# EAGLE board TD8Edaughter716 (EAGLE 6.6.0)
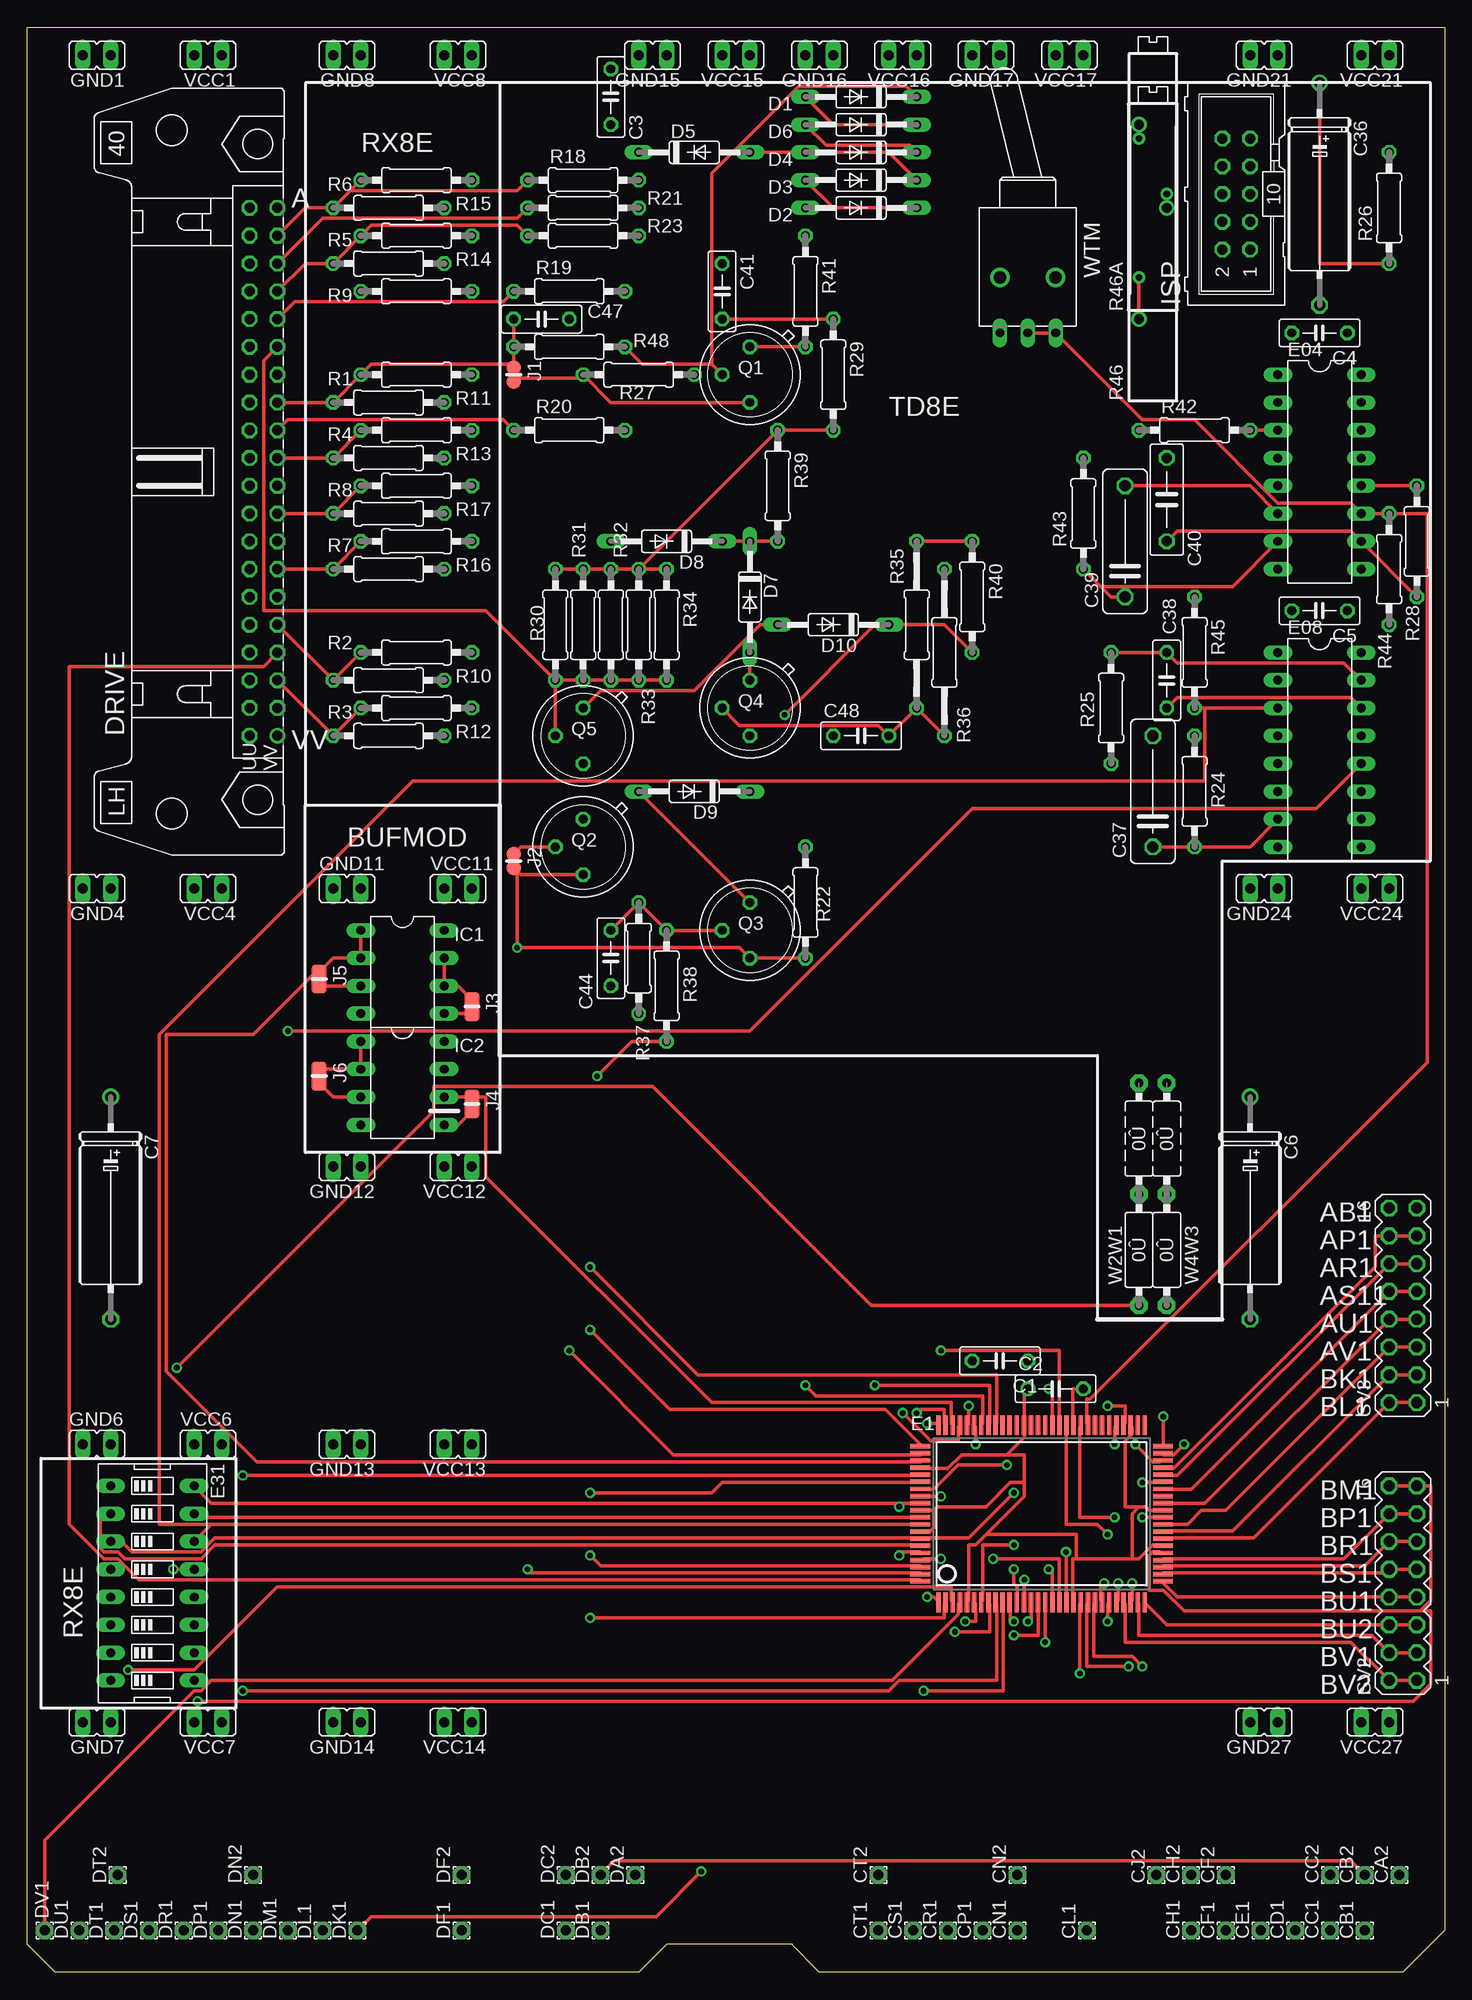
[diagram p0: board, top side]
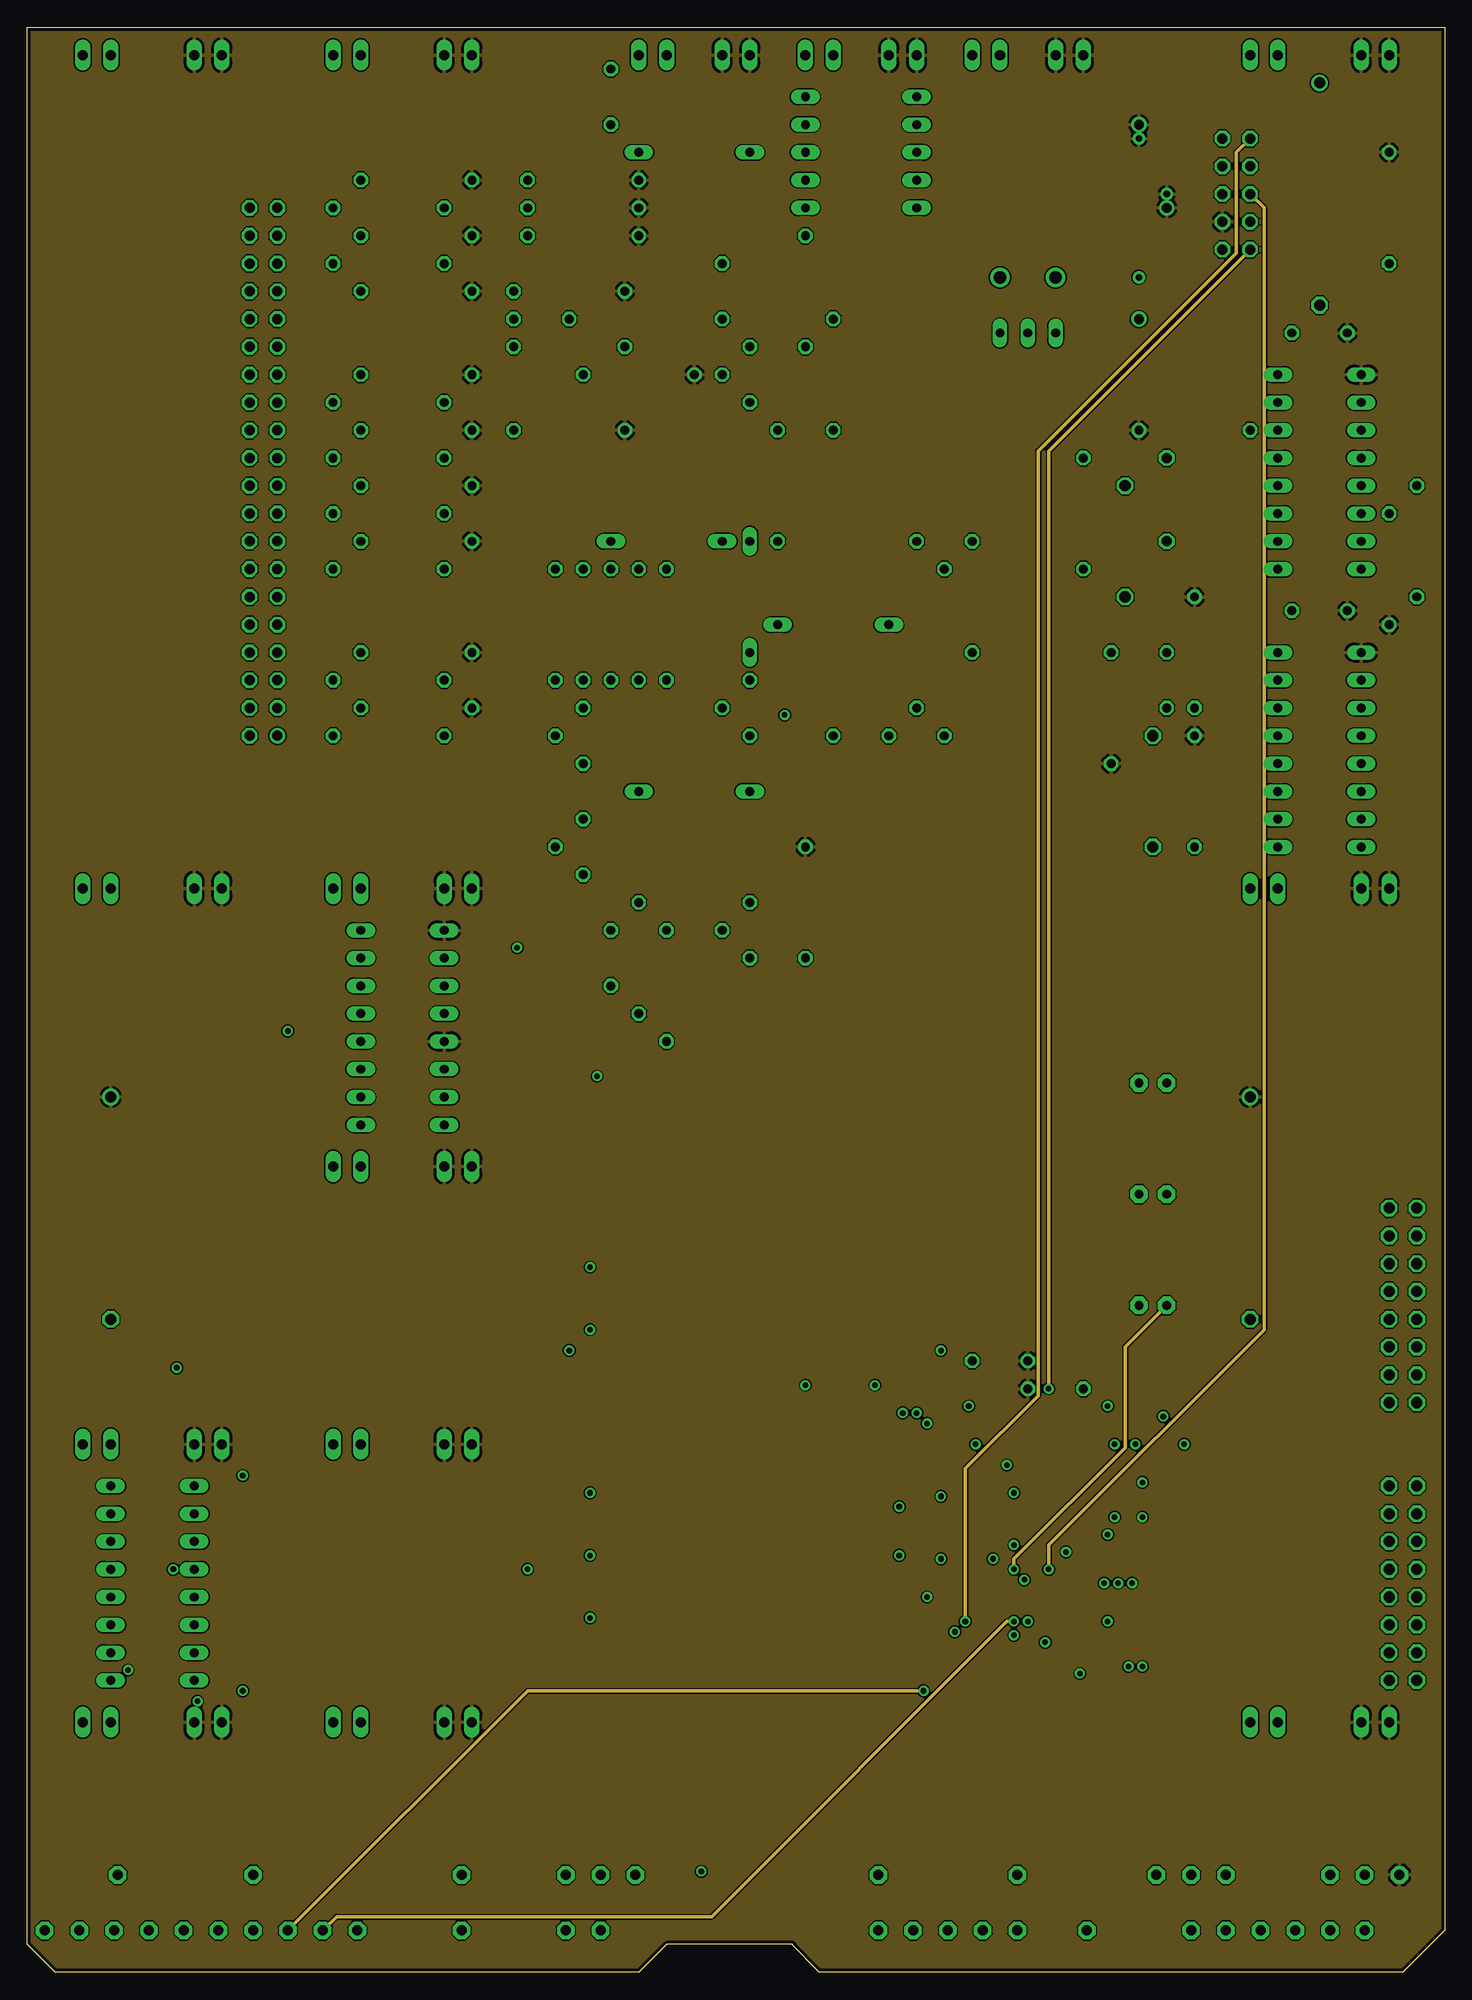
[diagram p1: board, inner layer VCC$]
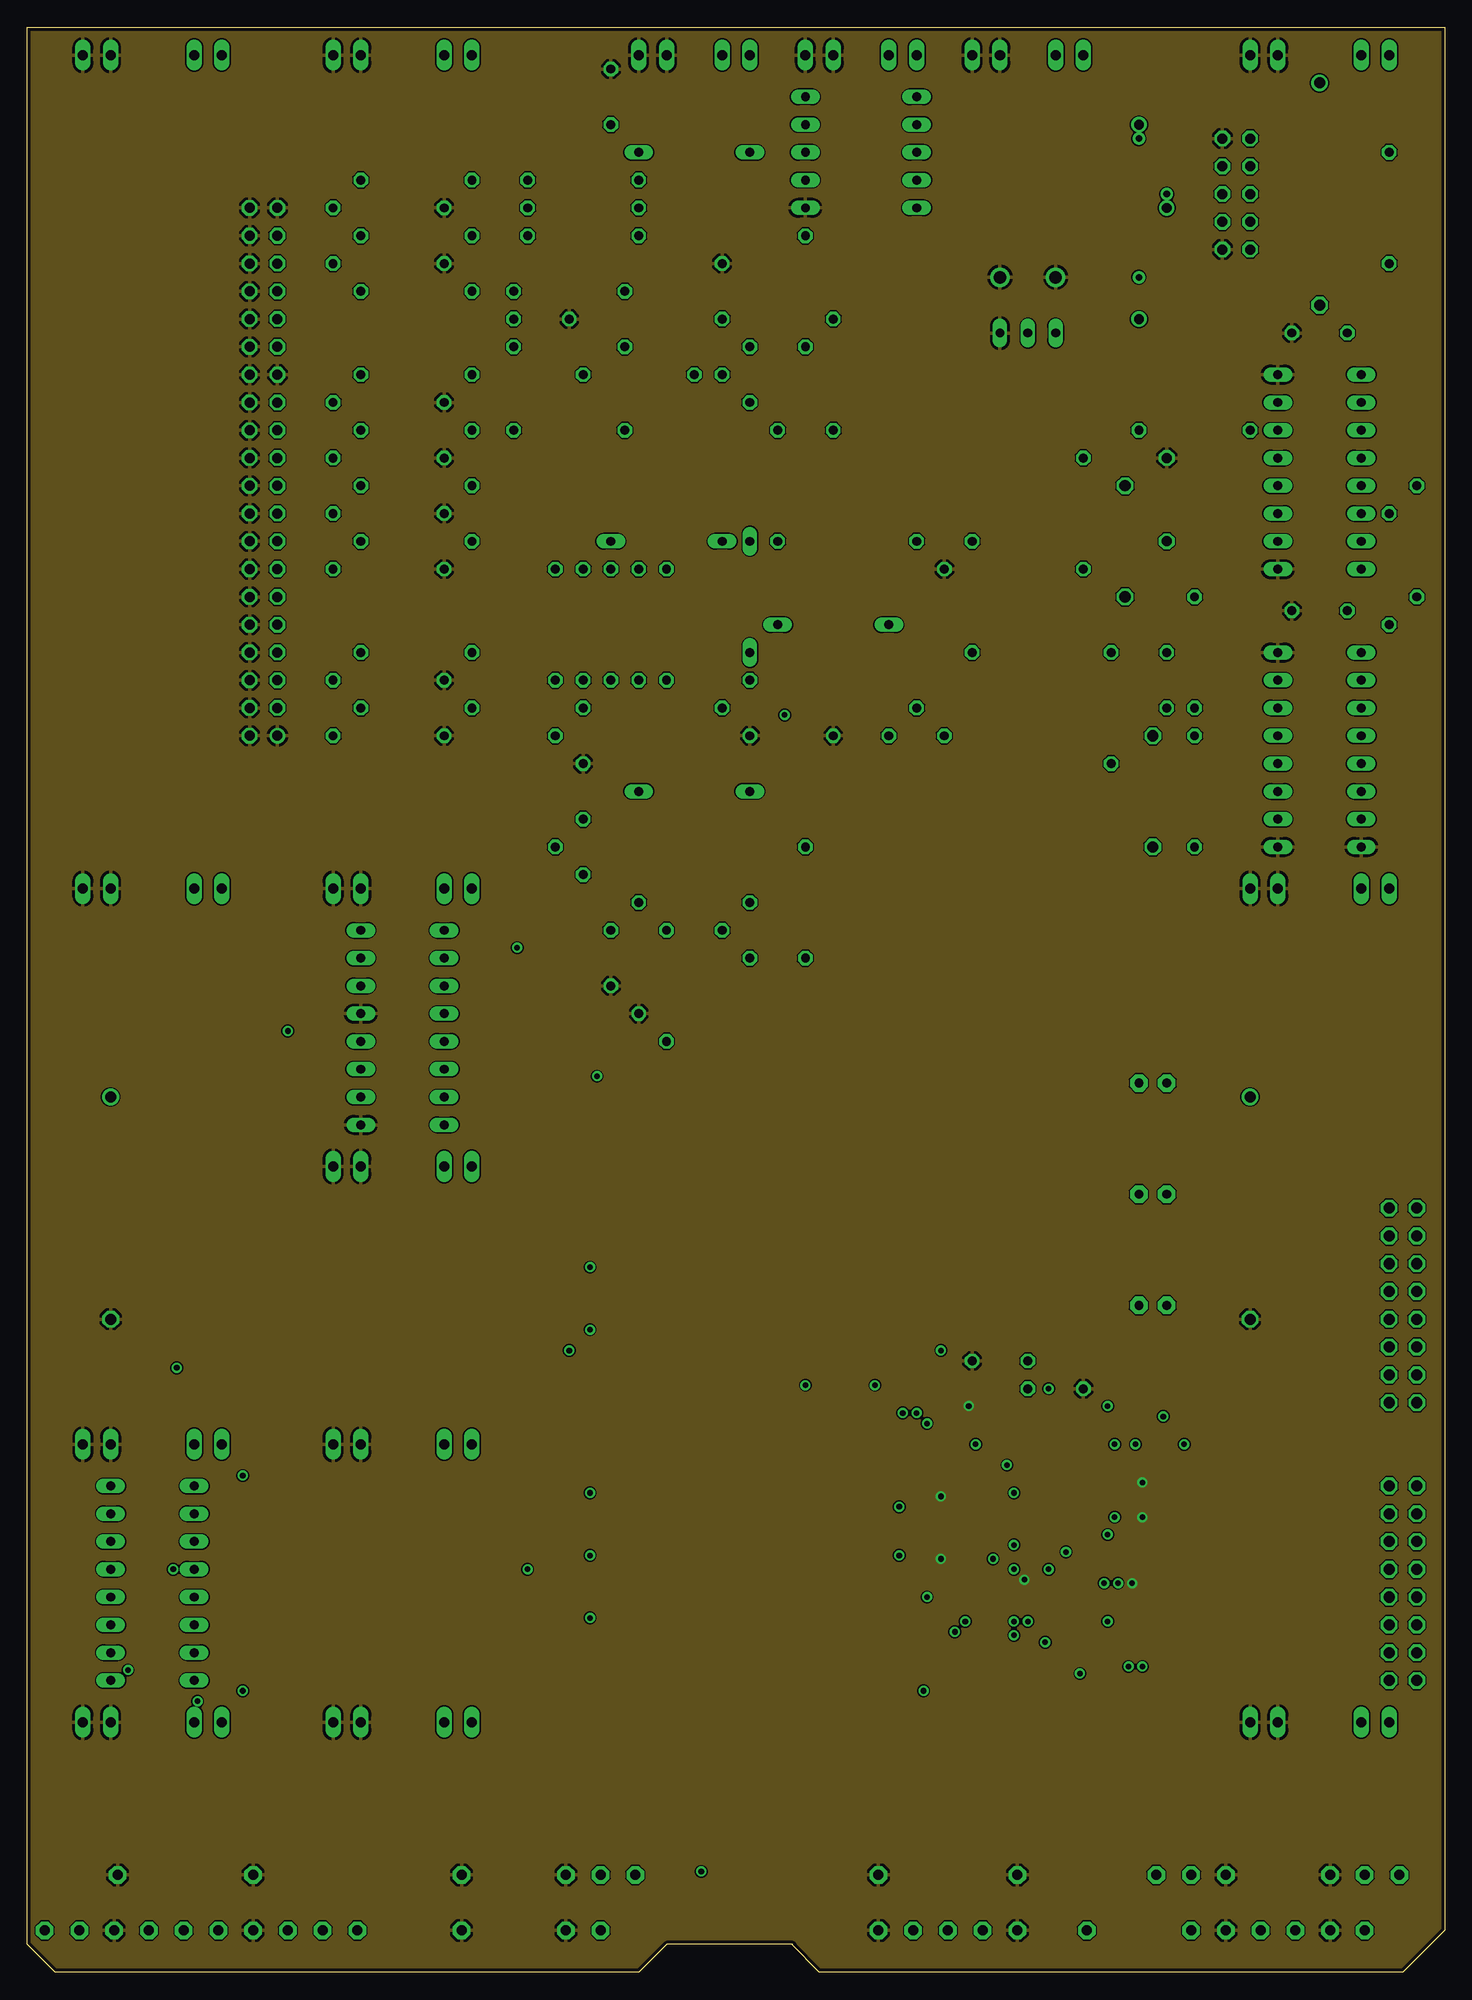
[diagram p2: board, inner layer GND$]
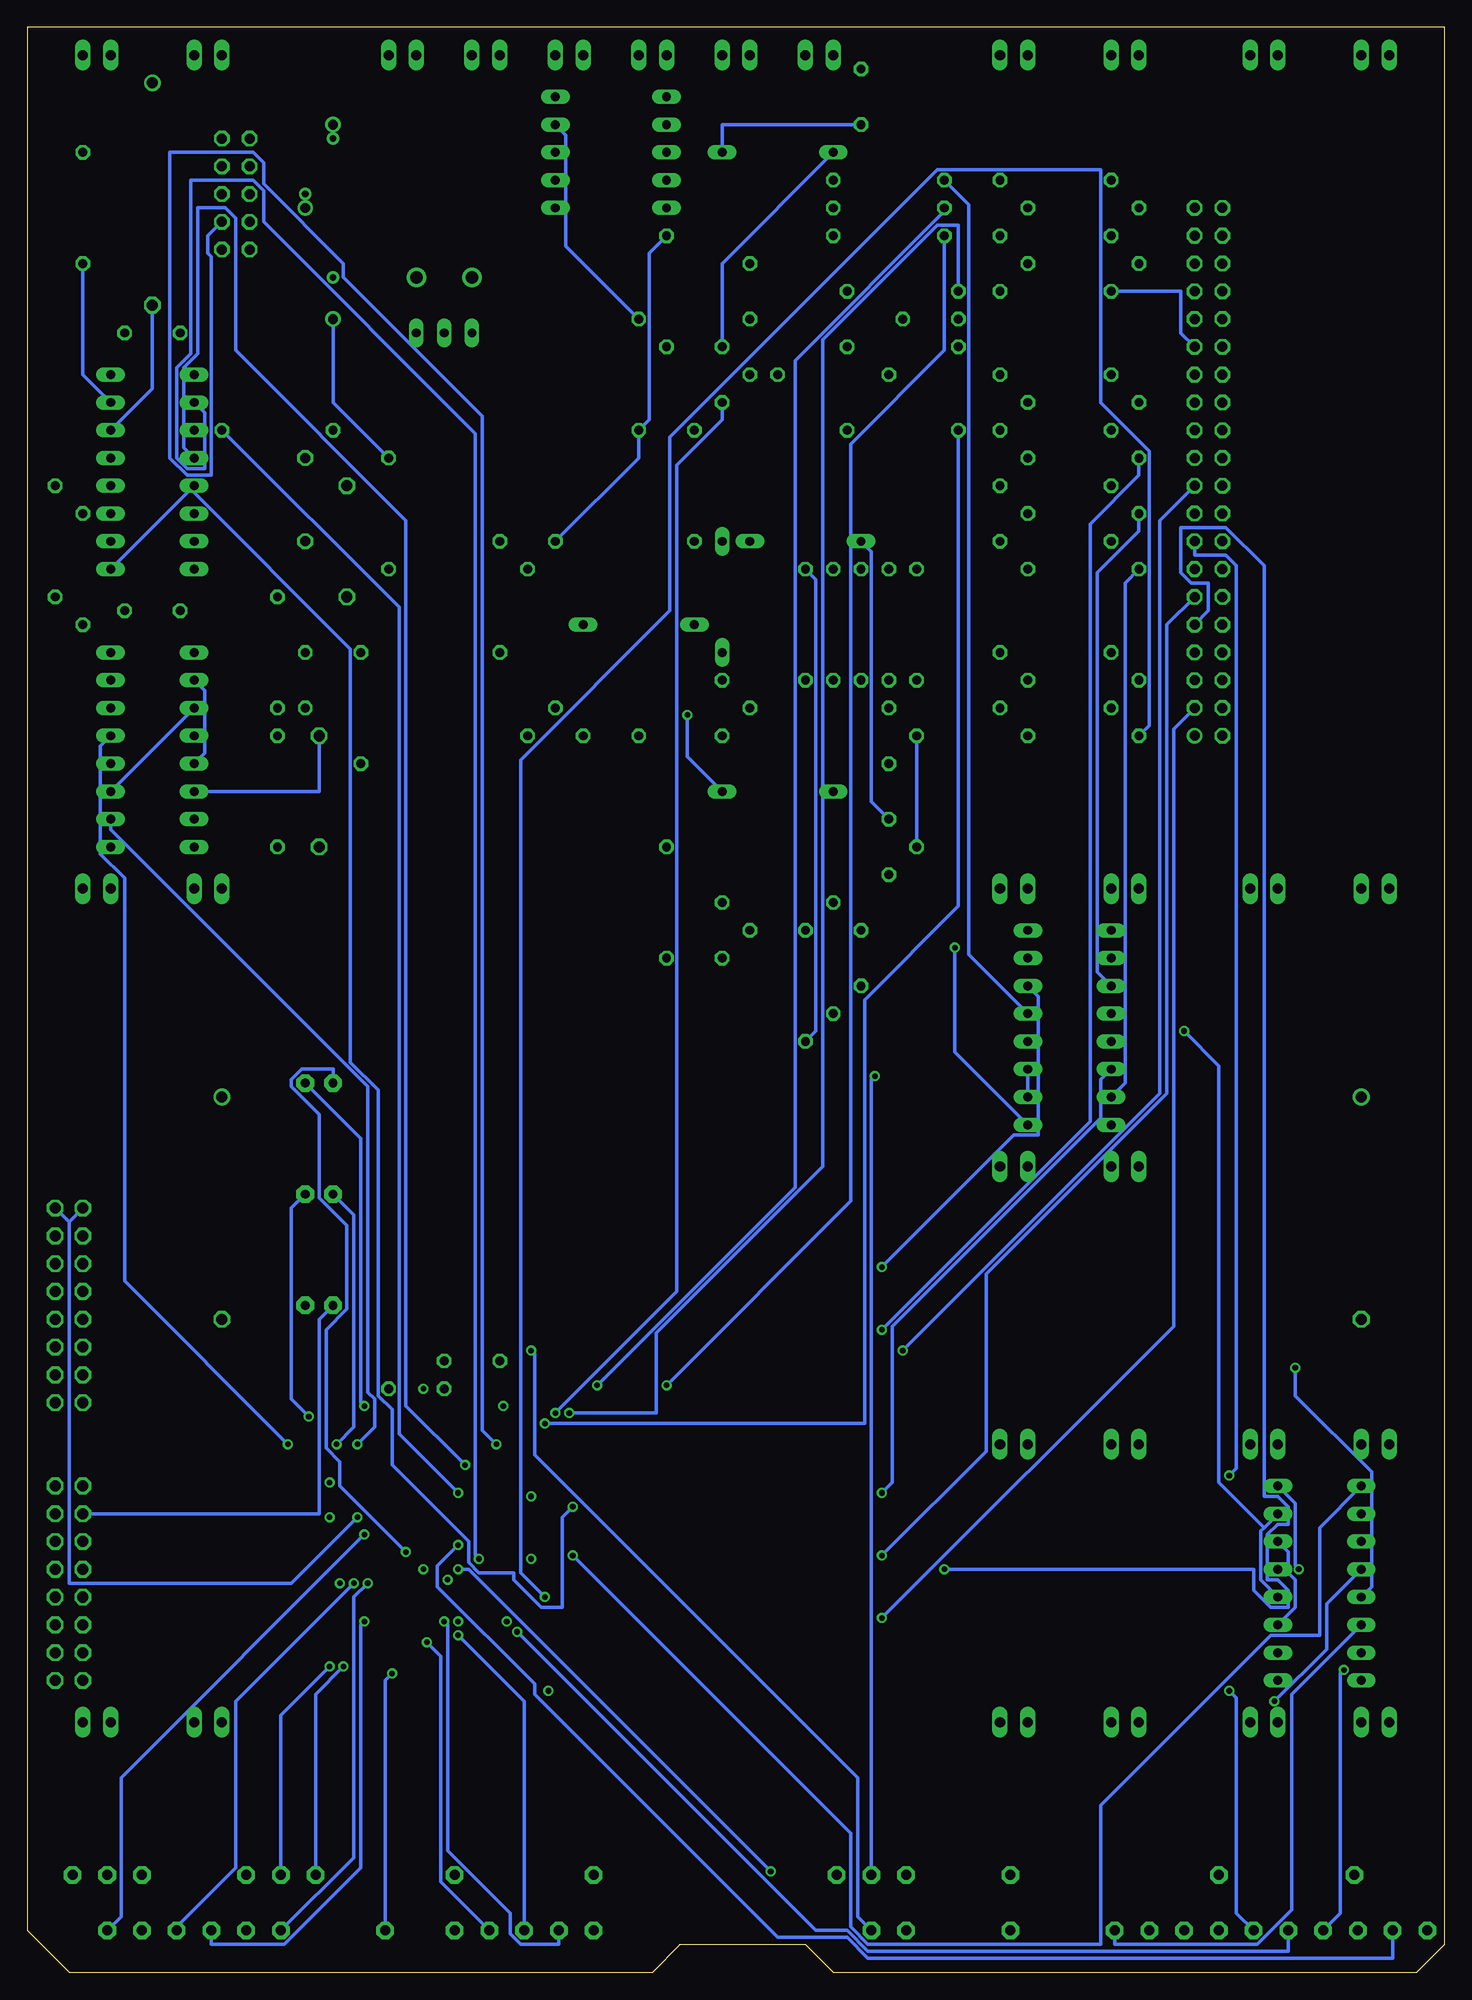
[diagram p3: board, bottom side, seen from below]

Size 129.54 x 177.8 mm. Coordinates in mm from the lower left corner, seen from the top.
Outline: 69.98,2.54 69.85,2.54
Outline: 69.85,2.54 72.39,0 125.73,0 129.54,3.81 129.54,177.8 0,177.8 0,2.54 2.54,0 55.88,0 58.42,2.54 69.85,2.54
Copper layers (1+2+3+16): Top 0.035mm / dielectric 1.5mm / VCC$ 0.035mm / dielectric 0.15mm / GND$ 0.035mm / dielectric 0.2mm / Bottom 0.035mm
Design rules "pld *": minimum track width 12mil, minimum drill 20mil, track to track 5mil, track to pad 5mil, pad to pad 5mil, via to via 10mil, smd to smd 5mil, copper to edge 13mil, drill to drill 10mil, minimum pad ring 10mil, minimum via ring 8mil, stop-mask expansion 0mil, vias tented up to drill 0mil, thermal gap 10mil

## Footprints (pad centres in the part's own frame; a part is rotated, then mirrored left to right if it is on the bottom)
C050-025X075 = drill 0.813 octagon: 1 -2.54,0; 2 2.54,0
E12-8 = drill 1.016: + -10.16,0 | drill 1.016 octagon: - 10.16,0
C102-043X133 = drill 1.016 octagon: 1 -5.08,0; 2 5.08,0
C075-032X103 = drill 0.914 octagon: 1 -3.81,0; 2 3.81,0
1,6/0,9 = drill 0.914 pad 1.6 octagon: 1 0,0
DO35-10 = drill 0.813 long: A 5.08,0; C -5.08,0
DEC40PINH = drill 0.914 octagon: A 24.13,1.27; AA -3.81,1.27; B 24.13,-1.27; BB -3.81,-1.27; C 21.59,1.27; CC -6.35,1.27; D 21.59,-1.27; DD -6.35,-1.27; E 19.05,1.27; EE -8.89,1.27; F 19.05,-1.27; FF -8.89,-1.27; H 16.51,1.27; HH -11.43,1.27; J 16.51,-1.27; JJ -11.43,-1.27; K 13.97,1.27; KK -13.97,1.27; L 13.97,-1.27; LL -13.97,-1.27; M 11.43,1.27; MM -16.51,1.27; N 11.43,-1.27; NN -16.51,-1.27; P 8.89,1.27; PP -19.05,1.27; R 8.89,-1.27; RR -19.05,-1.27; S 6.35,1.27; SS -21.59,1.27; T 6.35,-1.27; TT -21.59,-1.27; U 3.81,1.27; UU -24.13,1.27; V 3.81,-1.27; W 1.27,1.27; X 1.27,-1.27; Y -1.27,1.27; Z -1.27,-1.27 | drill 0.914: VV -24.13,-1.27
PQFP-100 = smd 0.4 x 1.8: 1 -9.425,-8.1; 2 -8.775,-8.1; 3 -8.125,-8.1; 4 -7.475,-8.1; 5 -6.825,-8.1; 6 -6.175,-8.1; 7 -5.525,-8.1; 8 -4.875,-8.1; 9 -4.225,-8.1; 10 -3.575,-8.1; 11 -2.925,-8.1; 12 -2.275,-8.1; 13 -1.625,-8.1; 14 -0.975,-8.1; 15 -0.325,-8.1; 16 0.325,-8.1; 17 0.975,-8.1; 18 1.625,-8.1; 19 2.275,-8.1; 20 2.925,-8.1; 21 3.575,-8.1; 22 4.225,-8.1; 23 4.875,-8.1; 24 5.525,-8.1; 25 6.175,-8.1; 26 6.825,-8.1; 27 7.475,-8.1; 28 8.125,-8.1; 29 8.775,-8.1; 30 9.425,-8.1; 51 9.425,8.1; 52 8.775,8.1; 53 8.125,8.1; 54 7.475,8.1; 55 6.825,8.1; 56 6.175,8.1; 57 5.525,8.1; 58 4.875,8.1; 59 4.225,8.1; 60 3.575,8.1; 61 2.925,8.1; 62 2.275,8.1; 63 1.625,8.1; 64 0.975,8.1; 65 0.325,8.1; 66 -0.325,8.1; 67 -0.975,8.1; 68 -1.625,8.1; 69 -2.275,8.1; 70 -2.925,8.1; 71 -3.575,8.1; 72 -4.225,8.1; 73 -4.875,8.1; 74 -5.525,8.1; 75 -6.175,8.1; 76 -6.825,8.1; 77 -7.475,8.1; 78 -8.125,8.1; 79 -8.775,8.1; 80 -9.425,8.1 | smd 1.8 x 0.4: 31 11.1,-6.175; 32 11.1,-5.525; 33 11.1,-4.875; 34 11.1,-4.225; 35 11.1,-3.575; 36 11.1,-2.925; 37 11.1,-2.275; 38 11.1,-1.625; 39 11.1,-0.975; 40 11.1,-0.325; 41 11.1,0.325; 42 11.1,0.975; 43 11.1,1.625; 44 11.1,2.275; 45 11.1,2.925; 46 11.1,3.575; 47 11.1,4.225; 48 11.1,4.875; 49 11.1,5.525; 50 11.1,6.175; 81 -11.1,6.175; 82 -11.1,5.525; 83 -11.1,4.875; 84 -11.1,4.225; 85 -11.1,3.575; 86 -11.1,2.925; 87 -11.1,2.275; 88 -11.1,1.625; 89 -11.1,0.975; 90 -11.1,0.325; 91 -11.1,-0.325; 92 -11.1,-0.975; 93 -11.1,-1.625; 94 -11.1,-2.275; 95 -11.1,-2.925; 96 -11.1,-3.575; 97 -11.1,-4.225; 98 -11.1,-4.875; 99 -11.1,-5.525; 100 -11.1,-6.175
DIL16 = drill 0.813 long: 1 -8.89,-3.81; 2 -6.35,-3.81; 3 -3.81,-3.81; 4 -1.27,-3.81; 5 1.27,-3.81; 6 3.81,-3.81; 7 6.35,-3.81; 8 8.89,-3.81; 9 8.89,3.81; 10 6.35,3.81; 11 3.81,3.81; 12 1.27,3.81; 13 -1.27,3.81; 14 -3.81,3.81; 15 -6.35,3.81; 16 -8.89,3.81
EDG-08 = drill 0.813 long: 1 -8.89,-3.81; 2 -6.35,-3.81; 3 -3.81,-3.81; 4 -1.27,-3.81; 5 1.27,-3.81; 6 3.81,-3.81; 7 6.35,-3.81; 8 8.89,-3.81; 9 8.89,3.81; 10 6.35,3.81; 11 3.81,3.81; 12 1.27,3.81; 13 -1.27,3.81; 14 -3.81,3.81; 15 -6.35,3.81; 16 -8.89,3.81
JP1 = drill 0.914 long: 1 0,-1.27; 2 0,1.27
DIL08 = drill 0.813 long: 1 -3.81,-3.81; 2 -1.27,-3.81; 3 1.27,-3.81; 4 3.81,-3.81; 5 3.81,3.81; 6 1.27,3.81; 7 -1.27,3.81; 8 -3.81,3.81
ML10 = drill 0.914 octagon: 1 -5.08,-1.27; 2 -5.08,1.27; 3 -2.54,-1.27; 4 -2.54,1.27; 5 0,-1.27; 6 0,1.27; 7 2.54,-1.27; 8 2.54,1.27; 9 5.08,-1.27; 10 5.08,1.27
NC1 = smd 1.346 x 1.346: 1 -0.635,0; 2 0.635,0
NC2 = smd 1.346 x 1.346: 1 -0.635,0; 2 0.635,0
TO5 = drill 0.813 octagon: 1 0,-2.54; 2 2.54,0; 3 0,2.54
0207/10 = drill 0.813 octagon: 1 -5.08,0; 2 5.08,0
0207/15 = drill 0.813 octagon: 1 -7.62,0; 2 7.62,0
3006Y = drill 0.9: 1 -8.89,1.27; 2 1.27,-1.27; 3 8.89,1.27
RTRIM3006P = drill 0.61: 1 -7.62,1.27; 2 0,-1.27; 3 5.08,1.27
MA08-2 = drill 1.016 octagon: 1 -8.89,-1.27; 2 -8.89,1.27; 3 -6.35,-1.27; 4 -6.35,1.27; 5 -3.81,-1.27; 6 -3.81,1.27; 7 -1.27,-1.27; 8 -1.27,1.27; 9 1.27,-1.27; 10 1.27,1.27; 11 3.81,-1.27; 12 3.81,1.27; 13 6.35,-1.27; 14 6.35,1.27; 15 8.89,-1.27; 16 8.89,1.27
0R2/10 = drill 0.813 pad 1.6 octagon: 1 -5.08,0; 2 5.08,0; 3 15.24,0
9070-1W = drill 0.813 long: 1 5.08,-2.54; 2 5.08,0; 3 5.08,2.54 | drill 1.118 pad 1.778: B 0,-2.54; B1 0,2.54

## Placement (x,y rotation side)
C1  .22uF  [C050-025X075]  88.9,55.88 180 top
C2  .22uF  [C050-025X075]  93.98,53.34 0 top
C3  .01uF  [C050-025X075]  53.34,171.45 270 top
C4  .01uF  [C050-025X075]  118.11,149.86 180 top
C5  .01uF  [C050-025X075]  118.11,124.46 180 top
C6  6.8uF  [E12-8]  111.76,69.85 270 top
C7  6.8uF  [E12-8]  7.62,69.85 270 top
C36  6.8uF  [E12-8]  118.11,162.56 270 top
C37  2700pF  [C102-043X133]  102.87,107.95 90 top
C38  27pF  [C050-025X075]  104.14,118.11 270 top
C39  2700pF  [C102-043X133]  100.33,130.81 90 top
C40  560pF  [C075-032X103]  104.14,134.62 90 top
C41  .01uF  [C050-025X075]  63.5,153.67 270 top
C44  .01uF  [C050-025X075]  53.34,92.71 90 top
C47  .01uF  [C050-025X075]  46.99,151.13 0 top
C48  .01uF  [C050-025X075]  76.2,113.03 0 top
CA2  [1,6/0,9]  125.41,8.89 90 top
CB1  [1,6/0,9]  122.24,3.81 90 top
CB2  [1,6/0,9]  122.24,8.89 90 top
CC1  [1,6/0,9]  119.06,3.81 90 top
CC2  [1,6/0,9]  119.06,8.89 90 top
CD1  [1,6/0,9]  115.89,3.81 90 top
CE1  [1,6/0,9]  112.71,3.81 90 top
CF1  [1,6/0,9]  109.54,3.81 90 top
CF2  [1,6/0,9]  109.54,8.89 90 top
CH1  [1,6/0,9]  106.36,3.81 90 top
CH2  [1,6/0,9]  106.36,8.89 90 top
CJ2  [1,6/0,9]  103.19,8.89 90 top
CL1  [1,6/0,9]  96.84,3.81 90 top
CN1  [1,6/0,9]  90.49,3.81 90 top
CN2  [1,6/0,9]  90.49,8.89 90 top
CP1  [1,6/0,9]  87.31,3.81 90 top
CR1  [1,6/0,9]  84.14,3.81 90 top
CS1  [1,6/0,9]  80.96,3.81 90 top
CT1  [1,6/0,9]  77.79,3.81 90 top
CT2  [1,6/0,9]  77.79,8.89 90 top
D1  1N4154  [DO35-10]  76.2,171.45 180 top
D2  1N4148  [DO35-10]  76.2,161.29 180 top
D3  1N4148  [DO35-10]  76.2,163.83 180 top
D4  1N4148  [DO35-10]  76.2,166.37 180 top
D5  1N4154  [DO35-10]  60.96,166.37 0 top
D6  1N4148  [DO35-10]  76.2,168.91 180 top
D7  1N4154  [DO35-10]  66.04,125.73 270 top
D8  1N4154  [DO35-10]  58.42,130.81 180 top
D9  1N4154  [DO35-10]  60.96,107.95 180 top
D10  1N4154  [DO35-10]  73.66,123.19 180 top
DA2  [1,6/0,9]  55.56,8.89 90 top
DB1  [1,6/0,9]  52.39,3.81 90 top
DB2  [1,6/0,9]  52.39,8.89 90 top
DC1  [1,6/0,9]  49.21,3.81 90 top
DC2  [1,6/0,9]  49.21,8.89 90 top
DF1  [1,6/0,9]  39.69,3.81 90 top
DF2  [1,6/0,9]  39.69,8.89 90 top
DK1  [1,6/0,9]  30.16,3.81 90 top
DL1  [1,6/0,9]  26.99,3.81 90 top
DM1  [1,6/0,9]  23.81,3.81 90 top
DN1  [1,6/0,9]  20.64,3.81 90 top
DN2  [1,6/0,9]  20.64,8.89 90 top
DP1  [1,6/0,9]  17.46,3.81 90 top
DR1  [1,6/0,9]  14.29,3.81 90 top
DRIVE  [DEC40PINH]  21.59,137.16 90 top
DS1  [1,6/0,9]  11.11,3.81 90 top
DT1  [1,6/0,9]  7.94,3.81 90 top
DT2  [1,6/0,9]  8.26,8.89 90 top
DU1  [1,6/0,9]  4.76,3.81 90 top
DV1  [1,6/0,9]  1.59,3.81 90 top
E1  ATF150X100PQFP  [PQFP-100]  92.71,41.91 0 top
E04  74123N  [DIL16]  118.11,137.16 270 top
E08  74123N  [DIL16]  118.11,111.76 270 top
E31  [EDG-08]  11.43,35.56 270 top
GND1  [JP1]  6.35,175.26 90 top
GND4  [JP1]  6.35,99.06 90 top
GND6  [JP1]  6.35,48.26 270 top
GND7  [JP1]  6.35,22.86 90 top
GND8  [JP1]  29.21,175.26 90 top
GND11  [JP1]  29.21,99.06 270 top
GND12  [JP1]  29.21,73.66 90 top
GND13  [JP1]  29.21,48.26 90 top
GND14  [JP1]  29.21,22.86 90 top
GND15  [JP1]  57.15,175.26 90 top
GND16  [JP1]  72.39,175.26 90 top
GND17  [JP1]  87.63,175.26 90 top
GND21  [JP1]  113.03,175.26 90 top
GND24  [JP1]  113.03,99.06 90 top
GND27  [JP1]  113.03,22.86 90 top
IC1  DS75453N  [DIL08]  34.29,91.44 270 top
IC2  DS75453N  [DIL08]  34.29,81.28 270 top
ISP  [ML10]  110.49,162.56 90 top
J1  JUMPER-NC  [NC1]  44.45,146.05 270 top
J2  JUMPER-NC  [NC1]  44.45,101.6 270 top
J3  JUMPER-NC2  [NC2]  40.64,88.27 270 top
J4  JUMPER-NC2  [NC2]  40.64,79.38 270 top
J5  JUMPER-NC2  [NC2]  26.67,90.81 270 top
J6  JUMPER-NC2  [NC2]  26.67,81.92 270 top
Q1  MPS6534  [TO5]  66.04,146.05 180 top
Q2  MPS6534  [TO5]  50.8,102.87 180 top
Q3  MPS6534  [TO5]  66.04,95.25 180 top
Q4  MPS6534  [TO5]  66.04,115.57 180 top
Q5  MPS6534  [TO5]  50.8,113.03 180 top
R1  180  [0207/10]  35.56,146.05 0 top
R2  180  [0207/10]  35.56,120.65 0 top
R3  180  [0207/10]  35.56,115.57 0 top
R4  180  [0207/10]  35.56,140.97 0 top
R5  180  [0207/10]  35.56,158.75 0 top
R6  180  [0207/10]  35.56,163.83 0 top
R7  180  [0207/10]  35.56,130.81 0 top
R8  180  [0207/10]  35.56,135.89 0 top
R9  120  [0207/10]  35.56,153.67 0 top
R10  390  [0207/10]  33.02,118.11 180 top
R11  390  [0207/10]  33.02,143.51 180 top
R12  390  [0207/10]  33.02,113.03 180 top
R13  390  [0207/10]  33.02,138.43 180 top
R14  390  [0207/10]  33.02,156.21 180 top
R15  390  [0207/10]  33.02,161.29 180 top
R16  390  [0207/10]  33.02,128.27 180 top
R17  390  [0207/10]  33.02,133.35 180 top
R18  270  [0207/10]  50.8,163.83 0 top
R19  270  [0207/10]  49.53,153.67 0 top
R20  270  [0207/10]  49.53,140.97 0 top
R21  270  [0207/10]  50.8,161.29 0 top
R22  6.8K  [0207/10]  71.12,97.79 90 top
R23  270  [0207/10]  50.8,158.75 0 top
R24  10K  [0207/10]  106.68,107.95 90 top
R25  4.7K  [0207/10]  99.06,115.57 270 top
R26  51K  [0207/10]  124.46,161.29 90 top
R27  1.5K  [0207/10]  55.88,146.05 0 top
R28  220  [0207/10]  127,130.81 90 top
R29  1.5K  [0207/10]  73.66,146.05 270 top
R30  1K  [0207/10]  48.26,123.19 270 top
R31  1K  [0207/10]  50.8,123.19 270 top
R32  1K  [0207/10]  53.34,123.19 270 top
R33  1K  [0207/10]  55.88,123.19 270 top
R34  1K  [0207/10]  58.42,123.19 270 top
R35  1.21K 1%  [0207/15]  81.28,123.19 270 top
R36  562 1%  [0207/15]  83.82,120.65 90 top
R37  1.5K  [0207/10]  55.88,92.71 270 top
R38  1K  [0207/10]  58.42,90.17 90 top
R39  1.5K  [0207/10]  68.58,135.89 270 top
R40  1K  [0207/10]  86.36,125.73 270 top
R41  3K  [0207/10]  71.12,153.67 270 top
R42  1K  [0207/10]  106.68,140.97 0 top
R43  4.7K  [0207/10]  96.52,133.35 90 top
R44  1.5K  [0207/10]  124.46,128.27 270 top
R45  1K  [0207/10]  106.68,120.65 270 top
R46  20K  [3006Y]  102.87,160.02 90 top
R46A  20K  [RTRIM3006P]  102.87,162.56 90 top
R48  470  [0207/10]  49.53,148.59 0 top
SV2  [MA08-2]  125.73,35.56 90 top
SV3  [MA08-2]  125.73,60.96 90 top
VCC1  [JP1]  16.51,175.26 90 top
VCC4  [JP1]  16.51,99.06 90 top
VCC6  [JP1]  16.51,48.26 270 top
VCC7  [JP1]  16.51,22.86 90 top
VCC8  [JP1]  39.37,175.26 90 top
VCC11  [JP1]  39.37,99.06 270 top
VCC12  [JP1]  39.37,73.66 90 top
VCC13  [JP1]  39.37,48.26 90 top
VCC14  [JP1]  39.37,22.86 90 top
VCC15  [JP1]  64.77,175.26 90 top
VCC16  [JP1]  80.01,175.26 90 top
VCC17  [JP1]  95.25,175.26 90 top
VCC21  [JP1]  123.19,175.26 90 top
VCC24  [JP1]  123.19,99.06 90 top
VCC27  [JP1]  123.19,22.86 90 top
W2W1  [0R2/10]  101.6,66.04 90 top
W4W3  [0R2/10]  104.14,66.04 90 top
WTM  [9070-1W]  91.44,154.94 270 top

## Library data of the parts
C1-C5 C37-C41 C44 C47 C48 R1-R45 R46A R48 = rcl
C6 C7 C36 DRIVE IC1 IC2 J1-J6 R46 = dec-con
CA2 CB1 CB2 CC1 CC2 CD1 CE1 CF1 CF2 CH1 CH2 CJ2 CL1 CN1 CN2 CP1 CR1 CS1 CT1 CT2 DA2 DB1 DB2 DC1 DC2 DF1 DF2 DK1 DL1 DM1 DN1 DN2 DP1 DR1 DS1 DT1 DT2 DU1 DV1 = wirepad
D1-D10 = diode
E1 = atmel-cpld
E04 E08 = 74xx-us
E31 = special
GND1 GND4 GND6-GND8 GND11-GND17 GND21 GND24 GND27 VCC1 VCC4 VCC6-VCC8 VCC11-VCC17 VCC21 VCC24 VCC27 W2W1 W4W3 = jumper
ISP = con-harting-ml; OC_FARNELL: unknown; OC_NEWARK: unknown
Q1-Q5 = transistor-npn
SV2 SV3 = con-lstb; OC_FARNELL: unknown; OC_NEWARK: unknown
WTM = switch

## Nets
!C0: CE1.1 E1.25
!C1: CH1.1 E1.24
!CC_TPG_CLK: C40.1 E04.10 R28.1
!CLRDLY: E1.94 E04.3 E31.3 R42.2
!DATA0: E1.46 SV3.11 SV3.12
!DATA1: E1.44 SV3.9 SV3.10
!DATA2: E1.42 SV3.7 SV3.8
!DATA3: E1.39 SV3.5 SV3.6
!DATA4: E1.33 SV2.11 SV2.12
!DATA5: E1.32 SV2.9 SV2.10
!DATA6: E1.31 SV2.7 SV2.8
!DATA7: E1.29 SV2.3 SV2.4
!DATA8: DR1.1 E1.8
!DATA9: DS1.1 E1.3
!DATA10: DU1.1 E1.7
!DATA11: DV1.1 E1.4
!DF_SEL_ER: IC2.5 J2.2 J4.2 Q2.3 Q3.3 R22.1
!DONE_SKIP: CB1.1 E1.62
!INT_RQST: CP1.1 E1.16
!INTERNAL_IO: CL1.1 E1.21
!IO_PAUSE: CD1.1 E1.26
!MD03: E1.47 SV3.13 SV3.14
!MD04: E1.38 SV3.3 SV3.4
!MD05: E1.37 SV3.1 SV3.2
!MD06: E1.35 E31.4 SV2.15 SV2.16
!MD07: E1.34 E31.5 SV2.13 SV2.14 W2W1.1
!MD08: DK1.1 E1.12 E31.6 W4W3.1
!MD09: DL1.1 E1.11
!MD10: DM1.1 E1.10
!MD11: DP1.1 E1.9
!POWER_OK: E1.27 SV2.1 SV2.2
!SKIP: CS1.1 E1.14
!TR_SKIP: DB1.1 E1.63
+15V: DA2.1
-1.5V: C3.2 D3.C D4.A D5.A
-3V: C41.2 D1.A D6.C R29.1
-4.7V: C48.2 Q4.2 R35.2 R36.1
-9V: C44.2 Q3.2 R37.1 R38.2
-15V [supply]: CB2.1 DB2.1 R29.2 R30.1 R31.1 R32.1 R33.1 R34.1 R35.1 R38.1 R39.1 R40.1 R41.1
BB: DRIVE.BB IC1.3 J5.2 R8.1 R17.2
BB-CPLD: E1.83 IC1.1 IC1.2 J5.1
CC_DTP: E1.49 E08.13
CC_SETDLY: E1.18 E04.2
CC_T/M_EN: E1.59 E04.11 R44.1 WTM.2 WTM.3
CC_TPG_CLK: E1.89 E04.5 E04.9 E31.13 E31.16
CC_TT_EN: E1.55 E08.10
D: DRIVE.D IC1.5 J3.2 R6.1 R15.2 R18.1
D-CPLD: E1.72 IC1.6 IC1.7 J3.1
DD: DRIVE.DD E1.85
F: DRIVE.F E1.73 R21.1
FF: DRIVE.FF IC2.3 J6.2 R7.1 R16.2
FF-CPLD: E1.86 IC2.1 IC2.2 J6.1
GND [supply]: C1.2 C2.2 C3.1 C4.2 C5.2 C6.- C7.- C40.2 C41.1 C44.1 C47.2 C48.1 CC1.1 CC2.1 CF1.1 CF2.1 CN1.1 CN2.1 CT1.1 CT2.1 D2.A DC1.1 DC2.1 DF1.1 DF2.1 DN1.1 DN2.1 DRIVE.A DRIVE.AA DRIVE.B DRIVE.C DRIVE.CC DRIVE.E DRIVE.EE DRIVE.H DRIVE.HH DRIVE.K DRIVE.KK DRIVE.M DRIVE.MM DRIVE.P DRIVE.PP DRIVE.R DRIVE.S DRIVE.SS DRIVE.U DRIVE.UU DRIVE.VV DRIVE.W DRIVE.Y DT1.1 DT2.1 E1.13 E1.28 E1.40 E1.45 E1.61 E1.76 E1.88 E1.97 E04.1 E04.8 E08.1 E08.8 E08.9 GND1.1 GND1.2 GND4.1 GND4.2 GND6.1 GND6.2 GND7.1 GND7.2 GND8.1 GND8.2 GND11.1 GND11.2 GND12.1 GND12.2 GND13.1 GND13.2 GND14.1 GND14.2 GND15.1 GND15.2 GND16.1 GND16.2 GND17.1 GND17.2 GND21.1 GND21.2 GND24.1 GND24.2 GND27.1 GND27.2 IC1.4 IC2.4 ISP.2 ISP.10 Q4.3 Q5.3 R10.1 R11.1 R12.1 R13.1 R14.1 R15.1 R16.1 R17.1 R36.2 R37.2 WTM.1 WTM.B WTM.B1
IN1: E1.92 E08.3 E08.11 E31.11 E31.14 R45.2
IN2: E1.91 E08.12 E31.12 E31.15
IN3: E1.87 E04.4
INITIALIZE: CR1.1 E1.15
J: DRIVE.J E1.74 R5.1 R14.2 R23.1
JJ: DRIVE.JJ E1.98
L: DRIVE.L E1.77 R19.1
LL: DRIVE.LL E1.99 R2.1 R10.2
N$18: E1.95 E31.2
N$19: E1.96 E31.1
N$51: D1.C Q1.2 R48.2
N$52: D5.C Q1.1 R41.2
N$54: D2.C D3.A
N$55: D9.C D10.C R40.2
N$56: D4.C D6.A
N$57: D10.A Q5.1
N$58: D9.A Q3.1
N$59: D8.A Q2.1
N$60: D7.A Q4.1
N$63: D7.C D8.C R39.2
N$77: E08.2 E08.5
N$78: C37.1 E08.7 R24.1
N$79: C38.1 E08.15 R25.1
N$81: C38.2 E08.14
N$82: C37.2 E08.6
N$94: C36.+ E04.15 R26.1
N$95: C36.- E04.14
N$108: C39.1 E04.7 R43.1
N$110: C39.2 E04.6
N$111: R43.2 R46.1 R46A.1
N$112: E04.12 R28.2
N-CPLD: E1.78 IC2.6 IC2.7 J4.1
N-DRIVE: DRIVE.N J2.1 Q2.2 Q5.2 R9.1 R30.2 R31.2 R32.2 R33.2 R34.2
NN: DRIVE.NN E1.100
PARITY: E1.60 SV3.15 SV3.16
RR: DRIVE.RR E1.1 R3.1 R12.2
RUN: E1.30 SV2.5 SV2.6
T-CPLD: E1.79 J1.2 Q1.3 R27.1
T-DRIVE: C47.1 DRIVE.T J1.1 R1.1 R11.2 R48.1
TCK: E1.64 ISP.1
TDI: E1.6 ISP.9
TDO: E1.75 ISP.3
TMS: E1.17 ISP.5
TP3: CH2.1 E1.23
TP4: CJ2.1 E1.22
TT: DRIVE.TT E1.2
V: DRIVE.V E1.80 R20.1
VCC [supply]: C1.1 C2.1 C4.1 C5.1 C6.+ C7.+ CA2.1 E1.5 E1.20 E1.36 E1.41 E1.53 E1.68 E1.84 E1.90 E1.93 E04.16 E08.16 IC1.8 IC2.8 ISP.4 R1.2 R2.2 R3.2 R4.2 R5.2 R6.2 R7.2 R8.2 R9.2 R18.2 R19.2 R20.2 R21.2 R22.2 R23.2 R24.2 R25.2 R26.2 R27.2 R42.1 R44.2 R45.1 R46.2 R46.3 R46A.2 R46A.3 VCC1.1 VCC1.2 VCC4.1 VCC4.2 VCC6.1 VCC6.2 VCC7.1 VCC7.2 VCC8.1 VCC8.2 VCC11.1 VCC11.2 VCC12.1 VCC12.2 VCC13.1 VCC13.2 VCC14.1 VCC14.2 VCC15.1 VCC15.2 VCC16.1 VCC16.2 VCC17.1 VCC17.2 VCC21.1 VCC21.2 VCC24.1 VCC24.2 VCC27.1 VCC27.2
W2: E1.19 W2W1.3
W2W1: E1.48 W2W1.2
W3: E1.54 W4W3.3
W4W3: E1.50 W4W3.2
X: DRIVE.X E1.81 R4.1 R13.2
Z: DRIVE.Z E1.82

## Tracks (layer width: path | path; a pad name or v marks a point on that pad's centre or on a via)
!C0  (via drill 0.51)
  Top 0.305: v98.74,32.07 98.74,33.66 E1.25
  Bottom 0.305: v98.74,32.07 99.06,31.75 99.06,9.53 106.05,2.54 112.71,2.54 CE1.1
!C1  (via drill 0.51)
  Top 0.305: v98.42,35.56 98.11,35.56 98.11,33.97 E1.24
  Bottom 0.305: v98.42,35.56 99.69,34.29 99.69,10.48 CH1.1
!CC_TPG_CLK
  Top 0.305: R28.1 E04.10 120.97,131.76 105.09,131.76 C40.1
!CLRDLY  (via drill 0.51)
  Top 0.305: E04.3 R42.2 | E31.3 8.57,39.37 9.53,38.42 15.88,38.42 17.14,39.69 81.6,39.69 E1.94 81.92,39.69 86.04,39.69 v90.17,43.81
  Bottom 0.305: R42.2 95.57,124.78 95.57,49.21 v90.17,43.81
!DATA0
  Top 0.305: E1.46 103.82,45.4 105.09,45.4 SV3.12 SV3.11
!DATA1
  Top 0.305: E1.44 103.82,44.13 106.36,44.13 SV3.10 SV3.9
!DATA2
  Top 0.305: E1.42 103.82,42.86 107.63,42.86 SV3.8 SV3.7
!DATA3
  Top 0.305: E1.39 103.82,40.96 106.05,40.96 107.31,42.23 109.54,42.23 SV3.6 SV3.5
!DATA4
  Top 0.305: E1.33 103.82,37.15 122.24,37.15 SV2.12 SV2.11
!DATA5
  Top 0.305: E1.32 103.82,36.51 124.14,36.51 SV2.10 SV2.9
!DATA6
  Top 0.305: E1.31 103.82,35.56 105.09,34.29 SV2.8 SV2.7
!DATA7
  Top 0.305: E1.29 101.6,33.66 101.6,30.8 122.87,30.8 SV2.4 SV2.3
!DATA8  (via drill 0.51)
  Top 0.305: v84.77,31.11 87.95,31.11 87.95,33.66 E1.8
  Bottom 0.305: v84.77,31.11 57.47,3.81 54.61,3.81 52.7,1.91 14.29,1.91 DR1.1
!DATA9  (via drill 0.51)
  Top 0.305: v9.21,27.62 15.24,27.62 22.86,35.24 84.45,35.24 84.45,33.97 E1.3
  Bottom 0.305: v9.21,27.62 9.53,27.3 9.53,5.4 DS1.1
!DATA10  (via drill 0.51)
  Top 0.305: v90.17,39.05 87.31,39.05 87.31,33.97 E1.7
  Bottom 0.305: v90.17,39.05 92.08,37.15 92.08,35.24 83.19,26.35 83.19,25.4 60.96,3.17 54.61,3.17 52.7,1.27 4.76,1.27 DU1.1
!DATA11
  Top 0.305: DV1.1 1.59,12.06 15.24,25.72 15.88,25.72 16.83,26.67 79.06,26.67 85.09,32.7 85.09,33.66 E1.4
!DF_SEL_ER  (via drill 0.51)
  Top 0.305: R22.1 Q3.3 65.09,93.66 v44.77,93.66 44.77,100.65 | J4.2 39.37,77.47 IC2.5 | 44.77,100.65 45.09,100.33 Q2.3 | 44.77,100.65 J2.2 44.77,100.65
  Bottom 0.305: IC2.5 44.77,84.14 v44.77,93.66
!DONE_SKIP  (via drill 0.51)
  Top 0.305: v98.74,40.01 97.79,40.96 94.93,40.96 94.93,49.85 E1.62
  Bottom 0.305: v98.74,40.01 120.97,17.78 120.97,5.08 CB1.1
!INT_RQST  (via drill 0.51)
  Top 0.305: v93.03,30.16 93.03,33.66 E1.16
  Bottom 0.305: v93.03,30.16 91.76,28.89 91.76,8.26 CP1.1
!INTERNAL_IO  (via drill 0.51)
  Top 0.305: v96.2,27.3 96.2,33.66 E1.21
  Bottom 0.305: v96.2,27.3 96.84,26.67 CL1.1
!IO_PAUSE  (via drill 0.51)
  Top 0.305: v99.69,35.56 99.69,33.97 E1.26
  Bottom 0.305: v99.69,35.56 110.49,24.77 110.49,9.53 115.89,4.13 CD1.1
!MD03
  Top 0.305: E1.47 103.82,46.04 104.78,46.04 123.19,64.45 123.19,67.31 SV3.14 SV3.13
!MD04
  Top 0.305: E1.38 103.82,40.32 110.17,40.32 SV3.4 SV3.3
!MD05
  Top 0.305: E1.37 103.82,39.69 112.08,39.69 SV3.2 SV3.1
!MD06  (via drill 0.51)
  Top 0.305: 127.32,33.02 105.73,33.02 103.82,34.92 102.55,34.92 102.55,38.1 102.87,38.42 103.5,38.42 E1.35 | 127.32,33.02 128.27,33.97 128.27,44.45 SV2.15 SV2.16 | v15.56,24.77 126.68,24.77 128.27,26.35 128.27,33.02 127.32,33.02
  Bottom 0.305: E31.4 10.79,33.66 10.79,29.53 v15.56,24.77
!MD07  (via drill 0.51)
  Top 0.305: E1.34 103.82,37.78 120.33,37.78 SV2.14 SV2.13 | v13.65,55.24 37.15,78.74 37.15,80.96 57.15,80.96 77.15,60.96 W2W1.1
  Bottom 0.305: E31.5 6.67,35.24 6.67,45.72 13.65,52.7 v13.65,55.24 | SV2.14 102.87,41.91 102.87,59.69 W2W1.1
!MD08  (via drill 0.51)
  Top 0.305: v90.17,36.83 90.17,35.56 90.49,35.24 90.49,33.97 E1.12 | v61.59,9.21 57.47,5.08 31.43,5.08 DK1.1
  VCC$ 0.305: v90.17,36.83 90.17,37.78 100.33,47.94 100.33,57.15 W4W3.1
  Bottom 0.305: E31.6 13.97,25.4 13.97,5.71 17.14,2.54 30.16,2.54 DK1.1 | v90.17,36.83 89.22,36.83 v61.59,9.21
!MD09  (via drill 0.51)
  Top 0.305: v90.17,32.07 89.85,32.07 89.85,33.66 E1.11
  VCC$ 0.305: v90.17,32.07 89.53,32.07 62.55,5.08 28.26,5.08 DL1.1
!MD10  (via drill 0.51)
  Top 0.305: v81.92,25.72 89.22,25.72 89.22,33.66 E1.10
  VCC$ 0.305: v81.92,25.72 45.72,25.72 DM1.1
!MD11  (via drill 0.51)
  Top 0.305: v19.68,25.72 78.74,25.72 79.69,26.67 88.58,26.67 88.58,33.66 E1.9
  Bottom 0.305: v19.68,25.72 19.05,25.08 19.05,5.4 DP1.1
!POWER_OK
  Top 0.305: E1.27 100.33,33.66 100.33,30.16 120.97,30.16 SV2.2 SV2.1
!SKIP  (via drill 0.51)
  Top 0.305: v91.44,32.07 91.76,32.07 91.76,33.66 E1.14
  Bottom 0.305: v91.44,32.07 91.12,31.75 91.12,11.11 85.41,5.4 85.41,3.49 84.45,2.54 80.96,2.54 CS1.1
!TR_SKIP  (via drill 0.51)
  Top 0.305: v83.5,56.83 94.3,56.83 94.3,50.16 E1.63
  Bottom 0.305: v83.5,56.83 83.19,56.52 83.19,47.31 53.66,17.78 53.66,5.08 DB1.1
-1.5V
  Top 0.305: D5.A D4.A 78.74,166.37 D3.C
  Bottom 0.305: C3.2 66.04,168.91 D5.A
-3V
  Top 0.305: R29.1 C41.2 | D1.A 73.66,168.91 D6.C
  Bottom 0.305: R29.1 80.33,157.8 80.33,167.96 D6.C
-4.7V
  Top 0.305: Q4.2 65.09,113.98 77.79,113.98 C48.2 R35.2 R36.1
-9V
  Top 0.305: C44.2 R37.1 R38.2 Q3.2
-15V  (via drill 0.51)
  Top 0.305: DB2.1 53.66,10.16 120.97,10.16 CB2.1 | R40.1 R35.1 | R29.2 R39.1 R33.1 | R30.1 R31.1 R32.1 R33.1 | R34.1 R33.1 | v52.07,81.92 55.24,85.09 R38.1
  Bottom 0.305: R41.1 72.71,157.16 72.71,141.92 R29.2 73.66,138.43 R35.1 | R38.1 57.47,86.04 57.47,127.32 R34.1 | DB2.1 52.39,81.6 v52.07,81.92
BB
  Top 0.305: IC1.3 J5.2 | R8.1 R17.2 DRIVE.BB
  Bottom 0.305: IC1.3 31.75,91.44 31.75,127.95 27.94,131.76 R17.2
BB-CPLD
  Top 0.305: E1.83 81.6,46.67 20.95,46.67 12.7,54.93 12.7,85.72 20.64,85.72 26.35,91.44 J5.1 27.94,92.71 IC1.2 IC1.1
CC_DTP  (via drill 0.51)
  Top 0.305: v105.73,48.26 104.78,47.31 103.82,47.31 E1.49
  Bottom 0.305: v105.73,48.26 120.65,63.18 120.65,100.01 122.87,102.23 122.87,112.08 E08.13
CC_SETDLY  (via drill 0.51)
  Top 0.305: v88.27,37.78 94.3,37.78 94.3,33.97 E1.18
  Bottom 0.305: v88.27,37.78 88.58,38.1 88.58,140.65 107.95,160.02 107.95,162.88 108.9,163.83 114.62,163.83 114.62,147.96 115.89,146.69 115.89,138.43 114.94,137.48 113.35,137.48 113.35,142.56 E04.2
CC_T/M_EN
  Top 0.305: WTM.2 WTM.3 101.92,141.92 106.68,141.92 114.3,134.3 120.97,134.3 E04.11 R44.1 127.95,133.35 127.95,83.19 97.16,52.39 96.84,52.39 96.84,50.16 E1.59
CC_TPG_CLK  (via drill 0.51)
  Top 0.305: 79.69,42.86 16.83,42.86 E31.16 | 79.69,42.86 81.6,42.86 E1.89 | v13.34,36.83 E31.13 | 79.69,42.86 v79.69,42.55
  Bottom 0.305: E04.9 114.62,135.57 | 114.62,135.57 E04.5 114.62,135.57 | v13.34,36.83 13.65,37.15 13.65,42.86 E31.16 | 114.62,135.57 100.01,120.97 100.01,83.19 97.47,80.64 97.47,52.7 96.2,51.44 96.2,46.35 89.22,39.37 89.22,37.47 88.27,36.51 85.09,36.51 85.09,35.88 82.55,33.34 80.64,33.34 80.64,41.59 v79.69,42.55
CC_TT_EN  (via drill 0.51)
  Top 0.305: v99.38,48.26 99.38,49.85 E1.55
  Bottom 0.305: v99.38,48.26 97.79,49.85 97.79,52.39 98.42,53.02 98.42,80.96 121.92,104.46 E08.10
D
  Top 0.305: IC1.5 J3.2 | R6.1 29.53,162.88 | 29.53,162.88 R15.2 25.4,161.29 DRIVE.D | R18.1 44.77,162.88 29.53,162.88
  Bottom 0.305: IC1.5 43.5,93.03 43.5,161.61 R18.1
D-CPLD  (via drill 0.51)
  Top 0.305: J3.1 39.37,90.17 IC1.6 IC1.7 | v51.44,64.45 61.28,54.61 88.58,54.61 88.58,50.16 E1.72
  Bottom 0.305: v51.44,64.45 39.37,76.52 37.15,76.52 37.15,89.22 IC1.6
DD  (via drill 0.51)
  Top 0.305: v19.68,45.4 81.6,45.4 E1.85
  Bottom 0.305: v19.68,45.4 19.05,46.04 19.05,128.59 20,129.54 22.86,129.54 DRIVE.DD
F  (via drill 0.51)
  Top 0.305: v77.47,53.66 87.95,53.66 87.95,50.16 E1.73 | DRIVE.F 26.99,160.34 44.77,160.34 R21.1
  Bottom 0.305: v77.47,53.66 59.37,71.75 59.37,147.32 45.72,160.97 R21.1
FF
  Top 0.305: J6.2 27.94,80.01 IC2.3 | R7.1 R16.2 DRIVE.FF
  Bottom 0.305: IC2.3 29.21,81.28 29.21,127 R16.2
FF-CPLD  (via drill 0.51)
  Top 0.305: J6.1 IC2.2 IC2.1 | v51.44,43.81 62.55,43.81 63.5,44.77 81.6,44.77 E1.86
  Bottom 0.305: v51.44,43.81 50.48,44.77 50.48,59.05 31.43,78.11 31.43,81.6 IC2.2
GND  (via drill 0.51)
  Top 0.305: C2.2 95.57,53.34 95.57,50.16 E1.61 | v83.5,37.78 81.92,37.78 E1.97 | v83.5,43.5 81.92,43.5 E1.88 | v86.04,51.75 86.04,50.16 E1.76 | v91.12,35.88 91.12,33.97 E1.13 | v100.97,35.56 100.97,33.97 E1.28 | v101.92,41.59 103.5,41.59 E1.40 | v101.92,44.77 103.5,44.77 E1.45
  pour GND$: 0,2.54 2.54,0 55.88,0 58.42,2.54 69.85,2.54 72.39,0 125.73,0 129.54,3.81 129.54,177.8 0,177.8
IN1
  Top 0.305: E08.3 107.63,115.57 | 107.63,115.57 R45.2 | 16.83,40.96 81.6,40.96 E1.92 | E31.14 16.83,40.96 | 107.63,115.57 107.63,108.9 35.24,108.9 12.06,85.72 12.06,40.96 16.83,40.96
  Bottom 0.305: E08.3 E08.11 | E31.11 13.65,33.34 13.65,35.88 14.29,36.51 14.29,38.42 E31.14
IN2  (via drill 0.51)
  Top 0.305: E31.15 15.56,41.59 81.6,41.59 E1.91 | E08.12 117.79,106.36 86.36,106.36 66.04,86.04 v23.81,86.04
  Bottom 0.305: E31.12 16.83,35.88 16.83,40.32 16.51,40.64 | E31.15 16.51,40.64 | v23.81,86.04 20.64,82.87 20.64,44.77 16.51,40.64
IN3  (via drill 0.51)
  Top 0.305: v89.53,46.35 85.09,46.35 82.87,44.13 81.92,44.13 E1.87
  Bottom 0.305: v89.53,46.35 94.93,51.75 94.93,132.72 110.49,148.27 110.49,160.34 111.44,161.29 113.98,161.29 113.98,147.96 115.25,146.69 115.25,139.38 E04.4
INITIALIZE  (via drill 0.51)
  Top 0.305: v90.17,30.8 92.39,30.8 92.39,33.66 E1.15
  Bottom 0.305: v90.17,30.8 84.14,24.77 CR1.1
J  (via drill 0.51)
  Top 0.305: DRIVE.J 25.4,156.21 R14.2 R5.1 31.43,159.7 44.77,159.7 R23.1 | v71.12,53.66 72.07,52.7 87.31,52.7 87.31,50.16 E1.74
  Bottom 0.305: v71.12,53.66 54.29,70.48 54.29,139.7 45.72,148.27 R23.1
JJ  (via drill 0.51)
  Top 0.305: v51.44,38.1 52.39,37.15 81.6,37.15 E1.98
  Bottom 0.305: v51.44,38.1 41.91,47.62 41.91,63.82 25.4,80.33 25.4,123.19 DRIVE.JJ
L  (via drill 0.51)
  Top 0.305: v80.01,51.12 82.55,48.58 85.09,48.58 85.09,49.85 E1.77 | DRIVE.L 24.45,152.72 43.5,152.72 R19.1
  Bottom 0.305: v80.01,51.12 72.07,51.12 72.07,58.42 56.83,73.66 56.83,149.22 46.35,159.7 44.45,159.7 R19.1
LL  (via drill 0.51)
  Top 0.305: R2.1 R10.2 DRIVE.LL | v45.72,36.83 46.04,36.51 81.6,36.51 E1.99
  Bottom 0.305: v45.72,36.83 17.46,36.83 17.46,34.92 15.88,33.34 14.29,33.34 14.29,34.92 15.24,35.88 16.19,35.88 16.19,40.01 15.24,40.96 14.29,40.96 14.29,42.55 15.24,43.5 16.51,43.5 16.51,128.59 20,132.08 24.13,132.08 24.13,127.95 23.18,127 21.59,127 21.59,124.46 DRIVE.LL
N$18
  Top 0.305: E31.2 6.67,41.91 6.67,38.73 6.99,38.42 8.26,38.42 8.89,37.78 15.88,37.78 17.14,39.05 81.6,39.05 E1.95
N$19  (via drill 0.51)
  Top 0.305: v79.69,38.1 80.01,38.42 81.6,38.42 E1.96
  Bottom 0.305: v79.69,38.1 54.29,12.7 54.29,4.13 52.7,2.54 31.43,2.54 31.43,15.24 15.88,30.8 11.43,30.8 11.43,40.64 E31.1
N$51
  Top 0.305: R48.2 56.2,147 62.55,147 | Q1.2 62.55,147 | D1.C 80.33,172.4 70.48,172.4 62.55,164.47 62.55,147
N$52
  Top 0.305: R41.2 Q1.1
  Bottom 0.305: D5.C 66.04,156.21 Q1.1
N$54
  Top 0.305: D3.A 73.66,161.29 D2.C
N$55  (via drill 0.51)
  Top 0.305: v69.22,114.94 77.47,123.19 D10.C 83.82,123.19 R40.2
  Bottom 0.305: D9.C 69.22,111.12 v69.22,114.94
N$56
  Top 0.305: D6.A 73.03,167 80.64,167 D4.C
N$57
  Top 0.305: Q5.1 52.39,117.16 60.96,117.16 66.99,123.19 D10.A
N$58
  Top 0.305: D9.A Q3.1
N$59
  Bottom 0.305: Q2.1 52.39,107 52.39,129.86 D8.A
N$60
  Top 0.305: D7.A Q4.1
N$63
  Top 0.305: D8.C D7.C R39.2
N$77
  Bottom 0.305: E08.5 113.35,111.44 113.35,117.16 E08.2
N$78
  Top 0.305: C37.1 R24.1 111.76,102.87 E08.7
N$79
  Top 0.305: R25.1 C38.1 105.09,119.7 120.33,119.7 E08.15
N$81
  Top 0.305: C38.2 105.09,116.52 120.97,116.52 E08.14
N$82
  Bottom 0.305: E08.6 102.87,107.95 C37.2
N$94
  Top 0.305: C36.+ 118.11,156.21 R26.1
  Bottom 0.305: E04.15 124.46,146.05 R26.1
N$95
  Bottom 0.305: E04.14 118.11,144.78 C36.-
N$108
  Top 0.305: 98.11,126.68 99.06,125.73 C39.1 | 98.11,126.68 R43.1 | E04.7 110.17,126.68 98.11,126.68
N$110
  Top 0.305: E04.6 111.76,135.89 C39.2
N$111
  Top 0.305: R46.1 R46A.1
  Bottom 0.305: R43.2 101.6,143.51 R46.1
N$112
  Top 0.305: R28.2 E04.12
N-CPLD
  Top 0.305: IC2.6 J4.1 41.91,80.01 41.91,72.71 62.55,52.07 84.45,52.07 84.45,50.16 E1.78
  Bottom 0.305: IC2.6 IC2.7
N-DRIVE
  Top 0.305: J2.1 45.09,102.87 Q2.2 | R30.2 Q5.2 | R30.2 R31.2 R32.2 R33.2 R34.2 | DRIVE.N 21.59,147.32 21.59,124.46 41.91,124.46 R30.2
  Bottom 0.305: R9.1 24.13,153.67 24.13,149.86 DRIVE.N | Q5.2 Q2.2
NN
  Top 0.305: DRIVE.NN 21.59,119.38 3.81,119.38 3.81,40.96 6.99,37.78 8.26,37.78 10.16,35.88 81.6,35.88 E1.100
PARITY  (via drill 0.51)
  Top 0.305: v99.38,41.59 96.2,41.59 96.2,49.85 E1.60
  Bottom 0.305: v99.38,41.59 105.41,35.56 125.73,35.56 125.73,68.58 | SV3.16 125.73,68.58 | 125.73,68.58 SV3.15
RR  (via drill 0.51)
  Top 0.305: v82.23,34.29 82.87,34.29 83.19,33.97 E1.1 | R3.1 R12.2 DRIVE.RR
  Bottom 0.305: v82.23,34.29 84.45,36.51 84.45,110.81 70.8,124.46 70.8,140.34 46.35,164.78 31.43,164.78 31.43,143.51 26.99,139.06 26.99,113.98 R12.2
RUN
  Top 0.305: E1.30 102.23,33.66 104.14,31.75 SV2.6 SV2.5
T-CPLD  (via drill 0.51)
  Top 0.305: J1.2 44.77,145.73 50.48,145.73 R27.1 53.34,143.51 Q1.3 | v81.28,51.12 81.6,51.44 83.82,51.44 83.82,50.16 E1.79
  Bottom 0.305: v81.28,51.12 70.17,62.23 70.17,137.79 66.04,141.92 Q1.3
T-DRIVE
  Top 0.305: 44.45,147 R48.1 C47.1 | 44.45,147 J1.1 44.45,147 | DRIVE.T R11.2 R1.1 31.43,147 44.45,147
TCK  (via drill 0.51)
  Top 0.305: v93.34,53.34 93.66,53.34 93.66,50.16 E1.64
  VCC$ 0.305: v93.34,53.34 93.34,139.06 ISP.1
TDI  (via drill 0.51)
  Top 0.305: v85.72,32.07 86.68,32.07 86.68,33.66 E1.6
  VCC$ 0.305: v85.72,32.07 85.72,46.04 92.39,52.7 92.39,139.06 110.49,157.16 110.49,166.37 ISP.9
TDO  (via drill 0.51)
  Top 0.305: v86.68,48.26 86.68,49.85 E1.75
  Bottom 0.305: v86.68,48.26 87.95,49.53 87.95,142.24 100.65,154.94 100.65,156.21 107.95,163.51 107.95,165.42 108.9,166.37 116.52,166.37 116.52,138.43 114.94,136.84 112.71,136.84 112.71,156.84 113.03,157.16 113.03,158.75 ISP.3
TMS  (via drill 0.51)
  Top 0.305: v93.34,36.83 93.66,36.83 93.66,33.97 E1.17
  VCC$ 0.305: v93.34,36.83 93.34,39.05 113.03,58.74 113.03,161.29 ISP.5
TP3  (via drill 0.51)
  Top 0.305: v101.92,27.94 100.97,28.89 97.47,28.89 97.47,33.66 E1.23
  Bottom 0.305: v101.92,27.94 106.36,23.5 CH2.1
TP4  (via drill 0.51)
  Top 0.305: v100.65,27.94 96.84,27.94 96.84,33.66 E1.22
  Bottom 0.305: v100.65,27.94 103.19,25.4 CJ2.1
TT  (via drill 0.51)
  Top 0.305: v51.44,32.38 83.82,32.38 83.82,33.66 E1.2
  Bottom 0.305: v51.44,32.38 24.77,59.05 24.77,113.67 DRIVE.TT
V  (via drill 0.51)
  Top 0.305: v82.23,50.16 83.19,50.16 E1.80 | DRIVE.V 23.81,141.92 43.5,141.92 R20.1
  Bottom 0.305: v82.23,50.16 53.02,50.16 53.02,88.9 44.45,97.47 R20.1
VCC
  Top 0.305: 100.97,37.78 101.6,37.78 102.87,39.05 103.5,39.05 E1.36 | 100.97,37.78 95.89,37.78 | 95.89,37.78 95.57,37.78 95.57,33.97 E1.20 | 101.6,42.55 102.23,42.55 102.55,42.23 103.5,42.23 E1.41 | 101.6,42.55 100.97,41.91 100.97,37.78 | 101.6,42.55 100.33,42.55 100.33,48.58 100.97,49.21 100.97,49.85 E1.53 | 82.87,42.23 82.87,40.64 82.55,40.32 81.92,40.32 E1.93 | 82.87,42.23 81.92,42.23 E1.90 | 89.53,47.31 85.41,47.31 84.14,46.04 81.92,46.04 E1.84 | 89.53,47.31 91.12,48.9 91.12,49.85 E1.68 91.12,50.16 91.12,53.34 C2.1 | 87.63,40.01 91.12,43.5 91.12,44.77 | 87.63,40.01 86.68,39.05 86.04,39.05 86.04,33.97 E1.5 | 91.12,44.77 91.12,47.31 89.53,47.31 | 82.87,42.23 83.19,42.55 87.63,42.55 89.85,44.77 91.12,44.77 | 95.89,37.78 95.89,40.01 87.63,40.01
  VCC$ 0.305: R46A.2 | 104.14,161.61 R46.2 104.14,161.61
  pour VCC$: 0,2.54 2.54,0 55.88,0 58.42,2.54 69.85,2.54 72.39,0 125.73,0 129.54,3.81 129.54,177.8 0,177.8
W2  (via drill 0.51)
  Top 0.305: v94.93,38.42 94.93,33.97 E1.19
  Bottom 0.305: v94.93,38.42 100.97,44.45 100.97,46.67 102.23,47.94 102.23,58.74 100.33,60.64 100.33,68.26 102.87,70.8 102.87,78.42 105.41,80.96 105.41,81.6 104.46,82.55 101.6,82.55 W2W1.3
W2W1  (via drill 0.51)
  Top 0.305: v101.28,48.26 102.87,46.67 103.5,46.67 E1.48
  Bottom 0.305: v101.28,48.26 99.69,49.85 99.69,69.22 W2W1.2
W3  (via drill 0.51)
  Top 0.305: v98.74,51.75 100.33,51.75 100.33,50.16 E1.54
  Bottom 0.305: v98.74,51.75 99.06,52.07 99.06,76.2 W4W3.3
W4W3  (via drill 0.51)
  Top 0.305: v103.82,50.8 103.82,48.26 E1.50
  Bottom 0.305: v103.82,50.8 105.41,52.39 105.41,69.85 W4W3.2
X  (via drill 0.51)
  Top 0.305: v51.44,58.74 58.74,51.44 78.42,51.44 81.6,48.26 E1.81 | R4.1 R13.2 DRIVE.X
  Bottom 0.305: v51.44,58.74 32.38,77.79 32.38,132.4 27.94,136.84 R13.2
Z  (via drill 0.51)
  Top 0.305: v49.53,56.83 59.05,47.31 81.6,47.31 E1.82
  Bottom 0.305: v49.53,56.83 26.04,80.33 26.04,132.72 DRIVE.Z

## Text on the board
tPlace: RX8E | A | TD8E | VV | BUFMOD | AB1 | AP1 | AR1 | AS11 | AU1 | AV1 | BK1 | BL1 | BM1 | BP1 | BR1 | BS1 | BU1 | RX8E | BU2 | BV1 | BV2
_tsilk: Lit.3V | B1 | CR2032H | 0.1uF | 74ABT540N | IC8 | 0.1uF | C1 | 74ACT20N | 100K | 22uF | 0.1uF | 62256 | 62256 | 200pF | C2 | IC7 | 2N3904 | 100K | DIS | EN | 7 | IC3 | 3 | 10K | IC4 | 5 | 1 | 6 | 2 | 4 | R5 | 0 | 0.1uF | 0.1uF | S1 | ON | 0.1uF | 74ABT245N | 74ABT245N | 0.1uF | 74ACT138N | 74HCT30N | 10K | 10K | 10K | IC2 | IC1 | C10 | 100uF | 10K | IC5 | IC6 | DV1 | DU1 | DT1 | DS1 | DR1 | DP1 | DN1 | DM1 | DL1 | DK1 | DJ1 | DH1 | DF1 | DE1 | DD1 | DC1 | DB1 | DA1 | CV1 | CU1 | CT1 | CS1 | CR1 | CP1 | CN1 | CM1 | CL1 | CK1 | CJ1 | CH1 | CF1 | CE1 | CD1 | CC1 | CB1 | CA1 | BV1 | BU1 | BT1 | BS1 | BR1 | BP1 | BN1 | BM1 | BL1 | BK1 | BJ1 | BH1 | BF1 | BE1 | BD1 | BC1 | BB1 | BA1 | AV1 | AU1 | AT1 | AS1 | AR1 | AP1 | AN1 | AM1 | AL1 | AK1 | AJ1 | AH1 | AF1 | AE1 | AD1 | AC1 | AB1 | AA1
_bsilk: DV2 | DU2 | DT2 | DS2 | DR2 | DP2 | DN2 | DM2 | DL2 | DK2 | DJ2 | DH2 | DF2 | DE2 | DD2 | DC2 | DB2 | DA2 | CV2 | CU2 | CT2 | CS2 | CR2 | CP2 | CN2 | CM2 | CL2 | CK2 | CJ2 | CH2 | CF2 | CE2 | CD2 | CC2 | CB2 | CA2 | BV2 | BU2 | BT2 | BS2 | BR2 | BP2 | BN2 | BM2 | BL2 | BK2 | BJ2 | BH2 | BF2 | BE2 | BD2 | BC2 | BB2 | BA2 | AV2 | AU2 | AT2 | AS2 | AR2 | AP2 | AN2 | AM2 | AL2 | AK2 | AJ2 | AH2 | AF2 | AE2 | AD2 | AC2 | AB2 | AA2